# EAGLE board Adafruit USB LiIon-LiPoly Charger (EAGLE 5.01)
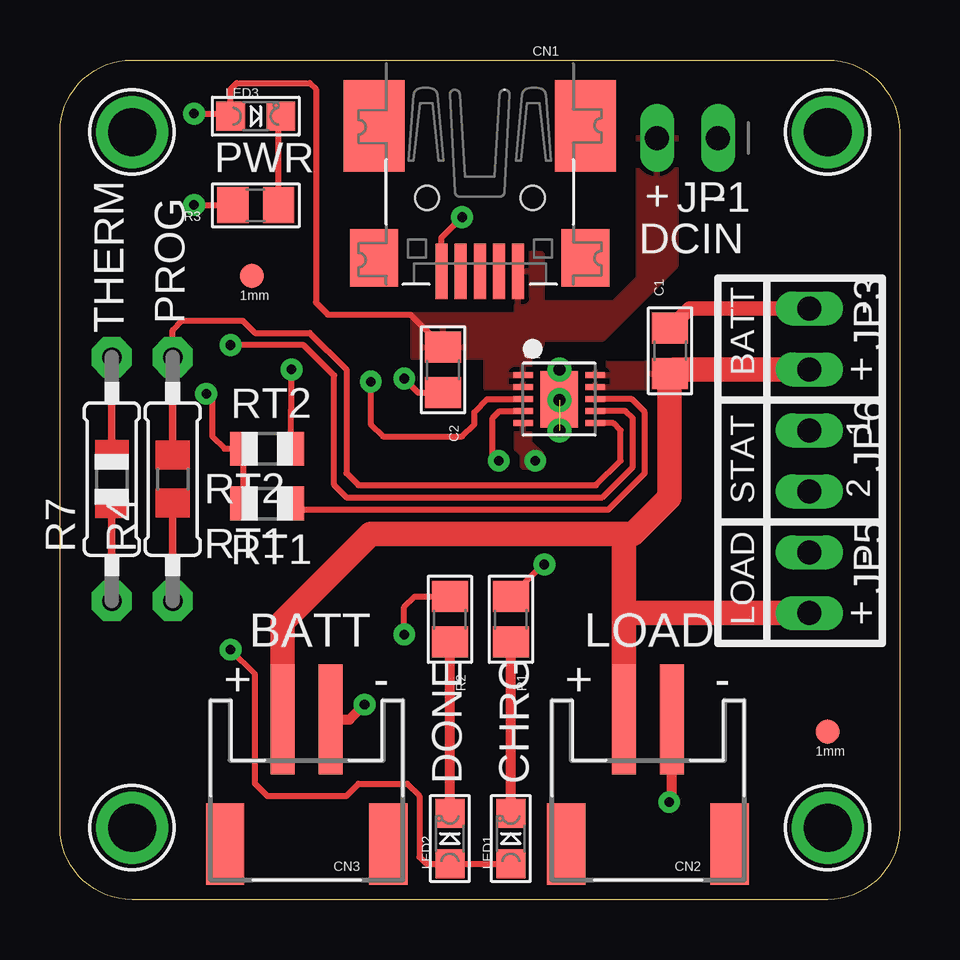
[diagram p0: board, top side]
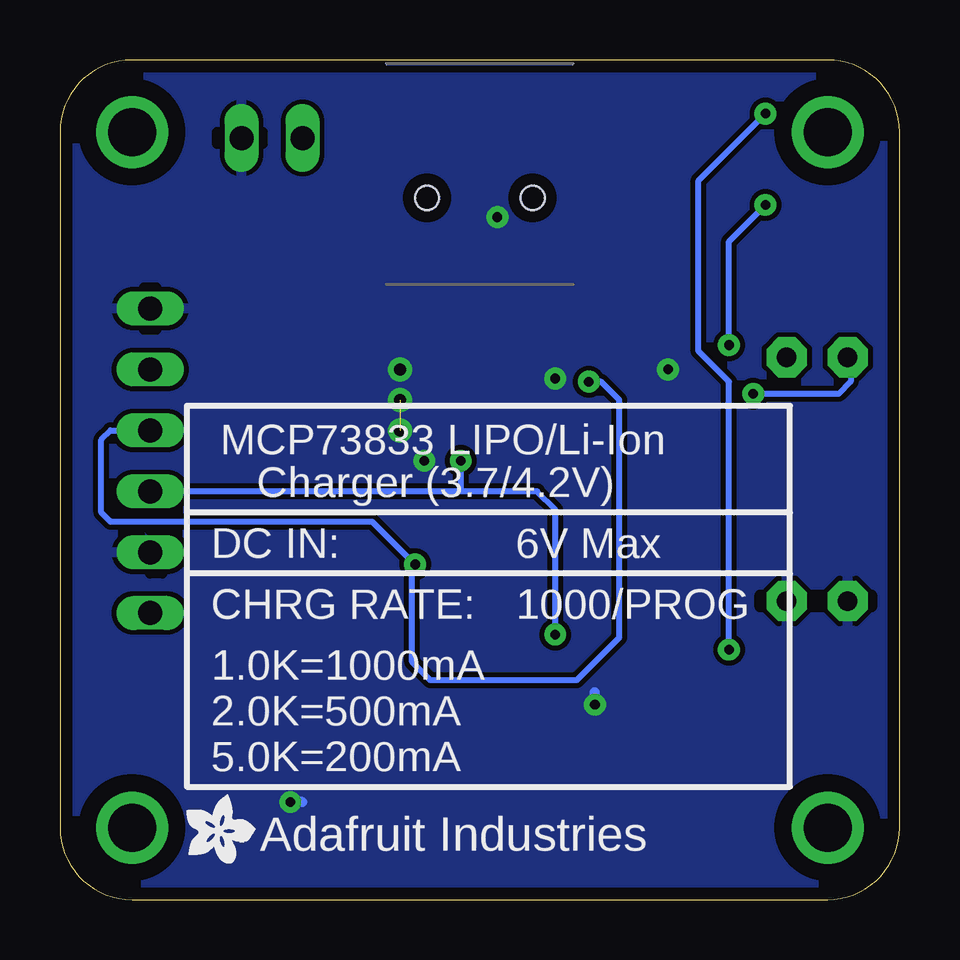
[diagram p1: board, bottom side, seen from below]

Size 35 x 35 mm. Coordinates in mm from the lower left corner, seen from the top.
Outline: 0,3 0,32 arc-90 3,35 32,35 arc-90 35,32 35,3 arc-90 32,0 3,0 arc-90 0,3
Copper layers (1*16): Top 0.035mm / dielectric 1.5mm / Bottom 0.035mm
Design rules "PCBCart-Standard": minimum track width 8mil, minimum drill 0.4mm, track to track 8mil, track to pad 8mil, pad to pad 8mil, via to via 8mil, smd to smd 8mil, copper to edge 20mil, drill to drill 8mil, minimum pad ring 8mil, minimum via ring 10mil, stop-mask expansion 3mil, vias tented up to drill 20mil, thermal gap 8mil
tRestrict: area 19.1,21.6 to 19.6,21.7; area 22.1,21.6 to 22.6,21.7; area 22.1,22.1 to 22.7,22.4
bRestrict: area 26.5,31.5 to 26.7,32; area 30.7,13.6 to 31.2,13.7; area 30.7,15.4 to 31.2,15.5; area 31,23.7 to 31.5,23.9; area 31,25.4 to 31.5,25.5; area 28.3,31.5 to 28.4,32; area 3.2,12.2 to 3.3,12.7; area 1.1,12.2 to 1.3,12.7; area 5.7,12.2 to 5.8,12.7; area 3.7,12.2 to 3.8,12.7

## Footprints (pad centres in the part's own frame; a part is rotated, then mirrored left to right if it is on the bottom)
0805 = smd 1.3 x 1.5: 1 -0.95,0; 2 0.95,0
USB-MINIB_LARGER = smd 0.5 x 2.308: D+ 0,4.064; D- -0.8,4.064; GND 1.6,4.064; ID 0.8,4.064; VBUS -1.6,4.064 | smd 2.54 x 3.81: GND1 -4.4,-2; GND4 4.4,-2 | smd 2 x 2.4: GND2 -4.4,3.5; GND3 4.4,3.5 | hole 1: -2.2,1; 2.2,1
JSTPH2 = smd 1 x 4.6: 1 -1,-3.7; 2 1,-3.7 | smd 1.6 x 3.4: NC1 -3.4,1.5; NC2 3.4,1.5
1X02_OVAL = drill 1 long: 1 -1.27,0; 2 1.27,0
FIDUCIAL-1X2.5 = smd 1 x 1: 1 0,0
CHIPLED_0805 = smd 1.2 x 1.2: A 0,-1.05; C 0,1.05
0805-THM = drill 0.813 pad 1.676 octagon: 1 -5.08,0; 2 5.08,0
R0805 = smd 1.1 x 1.4: 1 -1,0; 2 1,0
DFN10_3X3MM = smd 2.35 x 1.58: GND 0,0 | smd 0.25 x 0.8: P$1 -1,-1.5; P$2 -0.5,-1.5; P$3 0,-1.5; P$4 0.5,-1.5; P$5 1,-1.5; P$6 1,1.5; P$7 0.5,1.5; P$8 0,1.5; P$9 -0.5,1.5; P$10 -1,1.5
MOUNTINGHOLE_2.0_PLATED = drill 2 pad 3 round: P$1 0,0

## Placement (x,y rotation side)
C1  10uF  [0805]  25.43,22.88 90 top
C2  10uF  [0805]  15.97,22.08 270 top
CN1  USB  [USB-MINIB_LARGER]  17.5,30.25 180 top
CN2  BATT_IN_JST  [JSTPH2]  24.51,3.81 180 top
CN3  LOAD_JST  [JSTPH2]  10.29,3.81 180 top
JP1  PWR_IN_0.1  [1X02_OVAL]  26.16,31.75 180 top
JP2  FIDUCIAL1.5X3  [FIDUCIAL-1X2.5]  8,26 0 top
JP3  LOAD_0.1  [1X02_OVAL]  31.24,23.37 270 top
JP4  FIDUCIAL1.5X3  [FIDUCIAL-1X2.5]  32,7 0 top
JP5  BATT_IN_0.1  [1X02_OVAL]  31.24,13.21 270 top
JP6  STAT  [1X02_OVAL]  31.24,18.29 270 top
LED1  STAT1-ORANGE  [CHIPLED_0805]  18.8,2.54 0 top
LED2  STAT2-GREEN  [CHIPLED_0805]  16.26,2.54 0 top
LED3  Power-RED  [CHIPLED_0805]  8.16,32.66 270 top
R1  150  [0805]  18.8,11.68 270 top
R2  150  [0805]  16.26,11.68 270 top
R3  150  [0805]  8.16,28.94 180 top
R4  PROG  [0805-THM]  4.7,17.53 90 top
R7  10K/THERM  [0805-THM]  2.16,17.53 90 top
RT1  1K  [R0805]  8.64,16.51 180 top
RT2  150K  [R0805]  8.64,18.8 180 top
U1  MCP73833T-AMI/MF  [DFN10_3X3MM]  20.81,20.86 270 top
U$11  MOUNTINGHOLE2.0  [MOUNTINGHOLE_2.0_PLATED]  32,3 0 top
U$14  [ADAFRUIT200MIL]  28.32,3.05 270 bottom
U$16  MOUNTINGHOLE2.0  [MOUNTINGHOLE_2.0_PLATED]  32,32 0 top
U$18  MOUNTINGHOLE2.0  [MOUNTINGHOLE_2.0_PLATED]  3,32 0 top
U$19  MOUNTINGHOLE2.0  [MOUNTINGHOLE_2.0_PLATED]  3,3 0 top

## Library data of the parts
C1 C2 CN1-CN3 JP1-JP6 LED1-LED3 R1-R4 U1 U$11 U$16 U$18 U$19 = microbuilder
R7 RT1 RT2 U$14 = adafruit

## Nets
5.0V: C2.1 CN1.VBUS JP1.2 LED1.A LED2.A LED3.A U1.P$1 U1.P$2
BATT: C1.1 CN2.2 CN3.2 JP3.2 JP5.2 U1.P$9 U1.P$10
GND: C1.2 C2.2 CN1.GND CN2.1 CN3.1 JP1.1 JP3.1 JP5.1 R4.1 R7.1 RT2.1 U1.P$5
N$1: LED1.C R1.2
N$2: LED2.C R2.2
N$3: JP6.1 R1.1 U1.P$3
N$4: JP6.2 R2.1 U1.P$4
N$5: RT1.1 U1.P$8
N$6: R3.2 U1.P$7
N$8: R7.2 RT1.2 RT2.2
N$12: LED3.C R3.1
N$16: R4.2 U1.P$6

## Tracks (layer width: path | path; a pad name or v marks a point on that pad's centre or on a via)
5.0V  (via drill 0.4)
  Top 0.254: 15.89,23.11 C2.1 14.62,24.38 11.18,24.38 10.67,24.89 10.67,33.78 10.41,34.04 7.37,34.04 7.11,33.78 LED3.A 7,32.77 v5.59,32.77 | v7.11,10.41 8.13,9.4 8.13,4.83 8.64,4.32 11.94,4.32 12.45,4.83 14.48,4.83 14.99,4.32 14.99,1.78 15.27,1.49 LED2.A LED1.A
  Bottom 0.254: v7.11,10.41 7.11,21.59 8.38,22.86 8.38,29.97 v5.59,32.77
  pour Top: 19.05,26.92 20.07,26.92 20.07,23.11 19.56,23.11 19.56,21.34 17.78,21.34 17.78,22.35 17.78,22.61 14.73,22.61 14.73,24.38 19.05,24.38
  pour Top: 24.13,32.51 25.65,32.51 25.65,26.42 22.61,23.37 19.81,23.37 19.81,24.89 23.11,24.89 24.13,25.91
BATT
  Top 1.016: CN3.2 9.29,11.57 12.95,15.24 23.11,15.24 | 23.11,15.24 23.88,15.24 25.4,16.76 25.4,21.89 C1.1 25.6,22.1 JP3.2 | 23.51,11.94 23.51,15.1 23.11,15.24 | 23.51,11.94 CN2.2 | 23.51,11.94 JP5.2
  pour Top: 22.35,21.34 22.35,22.35 25.65,22.35 25.65,21.34
GND  (via drill 0.4, 0.5)  (1 unrouted)
  Top 0.254: CN1.GND 15.9,27.58 v16.76,28.45 | C2.2 14.94,21.13 v14.35,21.72 | RT2.1 v9.65,22.1
  Top 0.406: CN3.1 12.08,7.51 v12.7,8.13 | CN2.1 25.51,4.17 v25.4,4.06
  Top 0.61: JP3.1 26.24,24.64 C1.2
  Bottom 0.254: v16.76,28.45 17.02,28.45 | v19.81,18.29 20.07,18.29
  Bottom 0.406: v12.7,8.13 12.7,8.64 | 24.89,4.06 v25.4,4.06
  other vias: 20.83,22.1 20.83,20.83 20.83,19.56
  pour Bottom (isolate 0.203): 0,35 35,35 35,0 0,0
  pour Top: 19.05,19.81 19.56,19.81 19.56,19.05 20.07,18.54 20.07,18.03 19.3,18.03 19.3,18.54 19.05,18.8
N$1
  Top 0.406: LED1.C R1.2
N$2
  Top 0.406: LED2.C R2.2
N$3  (via drill 0.4)
  Top 0.254: v20.19,13.97 20.13,13.97 R1.1 | U1.P$3 17.81,20.86 17.27,20.32 17.27,19.81 16.76,19.3 13.46,19.3 12.95,19.81 v12.95,21.59
  Bottom 0.254: JP6.1 32.89,19.56 33.27,19.18 33.27,16.13 32.89,15.75 21.97,15.75 v20.19,13.97 20.32,13.84 20.32,9.91 19.56,9.14 13.46,9.14 11.68,10.92 11.68,20.83 12.45,21.59 v12.95,21.59
N$4  (via drill 0.4)
  Top 0.254: R2.1 14.79,12.63 14.35,12.19 v14.35,11.05 | U1.P$4 18.33,20.36 18.03,20.07 18.03,18.54 v18.29,18.29
  Bottom 0.254: 18.29,17.02 15.11,17.02 14.35,16.26 v14.35,11.05 | 18.29,17.02 JP6.2 | 18.29,17.02 v18.29,18.29
N$5
  Top 0.254: U1.P$8 23.84,20.86 24.38,20.32 24.38,17.78 22.86,16.26 9.89,16.26 RT1.1
N$6  (via drill 0.4)
  Top 0.254: U1.P$7 23.58,20.36 23.88,20.07 23.88,18.03 22.61,16.76 11.94,16.76 11.43,17.27 11.43,21.84 10.16,23.11 v7.11,23.11 | v5.59,28.96 7.19,28.96 R3.2
  Bottom 0.254: v7.11,23.11 7.11,27.43 v5.59,28.96
N$8  (via drill 0.4)
  Top 0.254: RT1.2 RT2.2 6.86,18.8 6.35,19.3 6.35,20.83 v6.1,21.08
  Bottom 0.254: v6.1,21.08 2.54,21.08 2.03,21.59 2.03,22.48 R7.2
N$12
  Top 0.254: R3.1 9.11,32.55 LED3.C
N$16
  Top 0.254: R4.2 4.7,23.75 5.08,24.13 7.62,24.13 8.13,23.62 10.41,23.62 11.94,22.1 11.94,17.78 12.45,17.27 22.35,17.27 23.37,18.29 23.37,19.56 23.07,19.86 U1.P$6

## Text on the board
tPlace: PWR | + | - | DCIN | THERM | PROG | - | BATT | + | RT2 | 1 | STAT | 2 | RT1 | - | BATT | LOAD | LOAD | + | DONE | CHRG
bPlace: MCP73833 LIPO/Li-Ion | Charger (3.7/4.2V) | 6V Max | DC IN: | 1000/PROG | CHRG RATE: | 1.0K=1000mA | 2.0K=500mA | 5.0K=200mA | Adafruit Industries